# Altium PCB 800U R3N3_LED_V1.2.PcbDoc (part 1 of 2)
Units mm, origin at the board's own origin, x right, y up, seen from the top; angles counter-clockwise.
Board outline 308.48 x 220.22 mm, 4 copper layers (Top Layer, Mid-Layer 2, GND, Bottom Layer); 102 components, 70 nets, 266 pads, 117 vias.
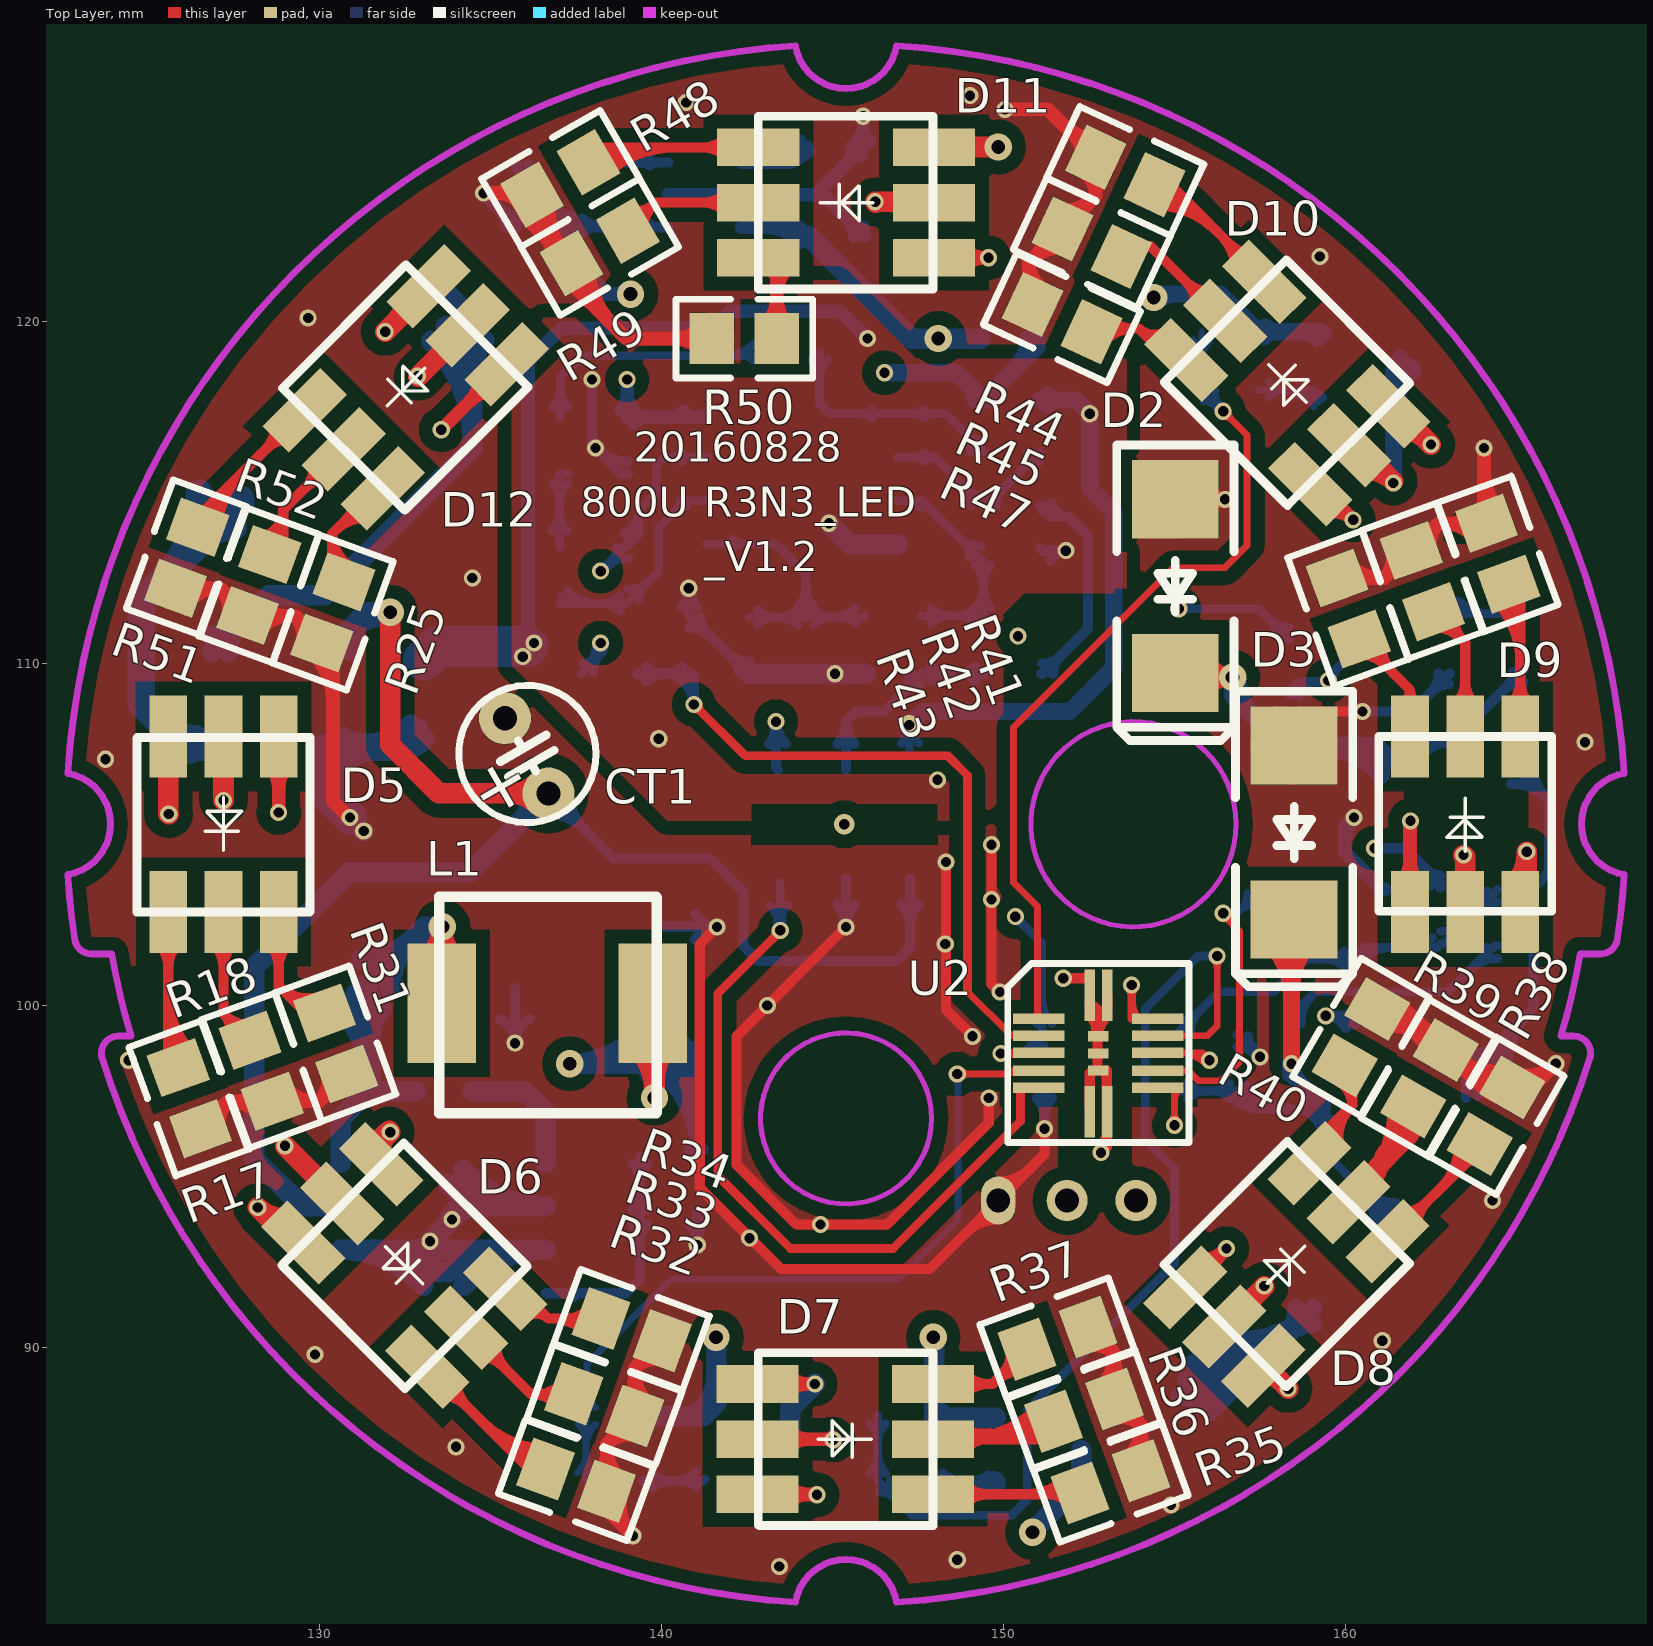
[diagram p0: Top Layer view]
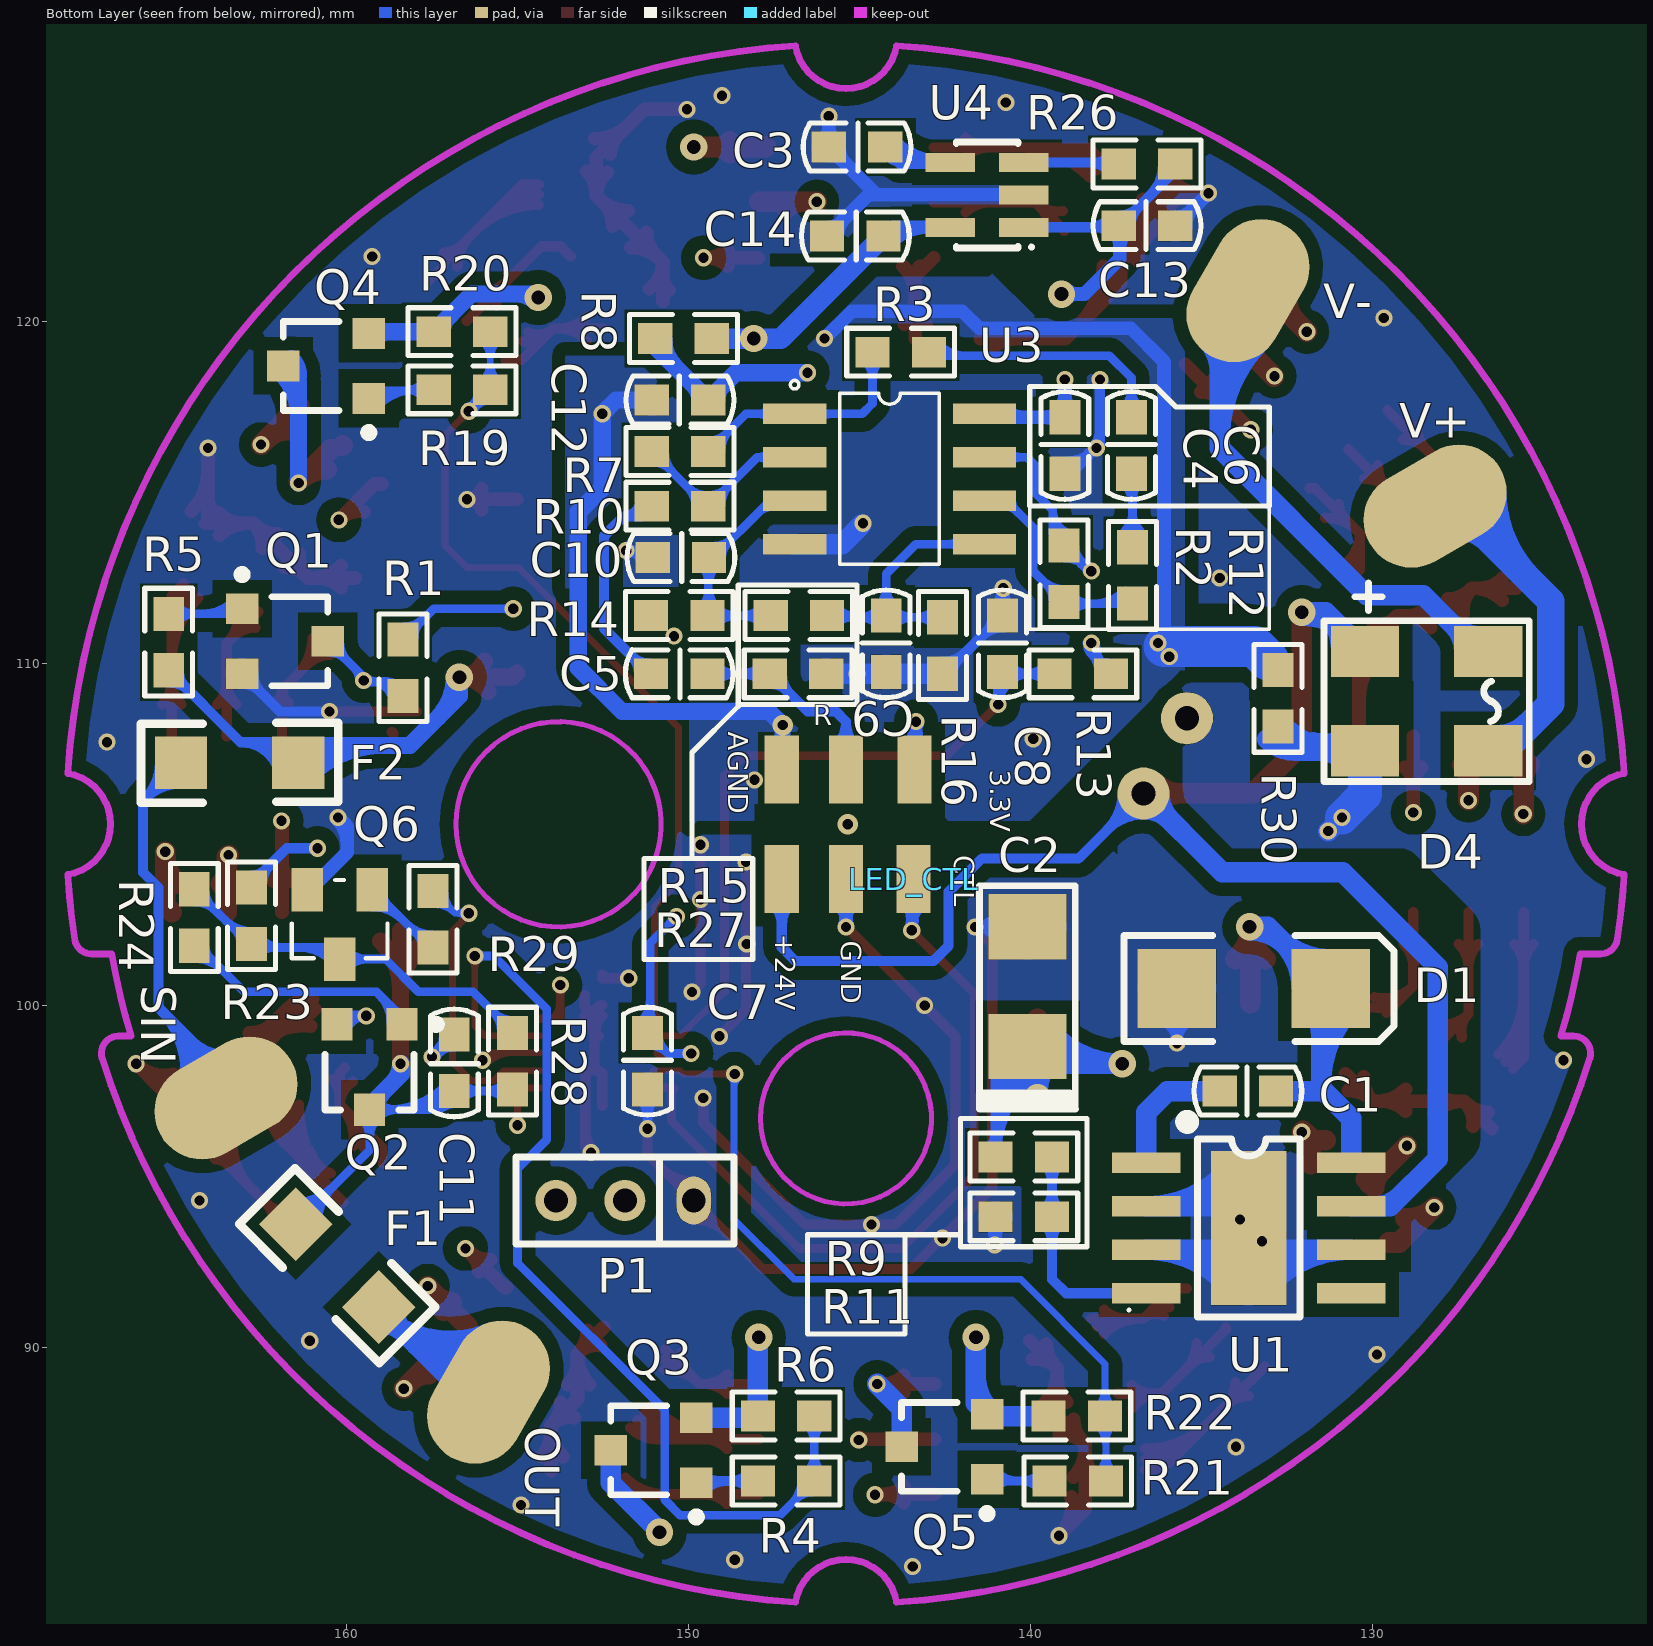
[diagram p1: Bottom Layer view, seen from below]
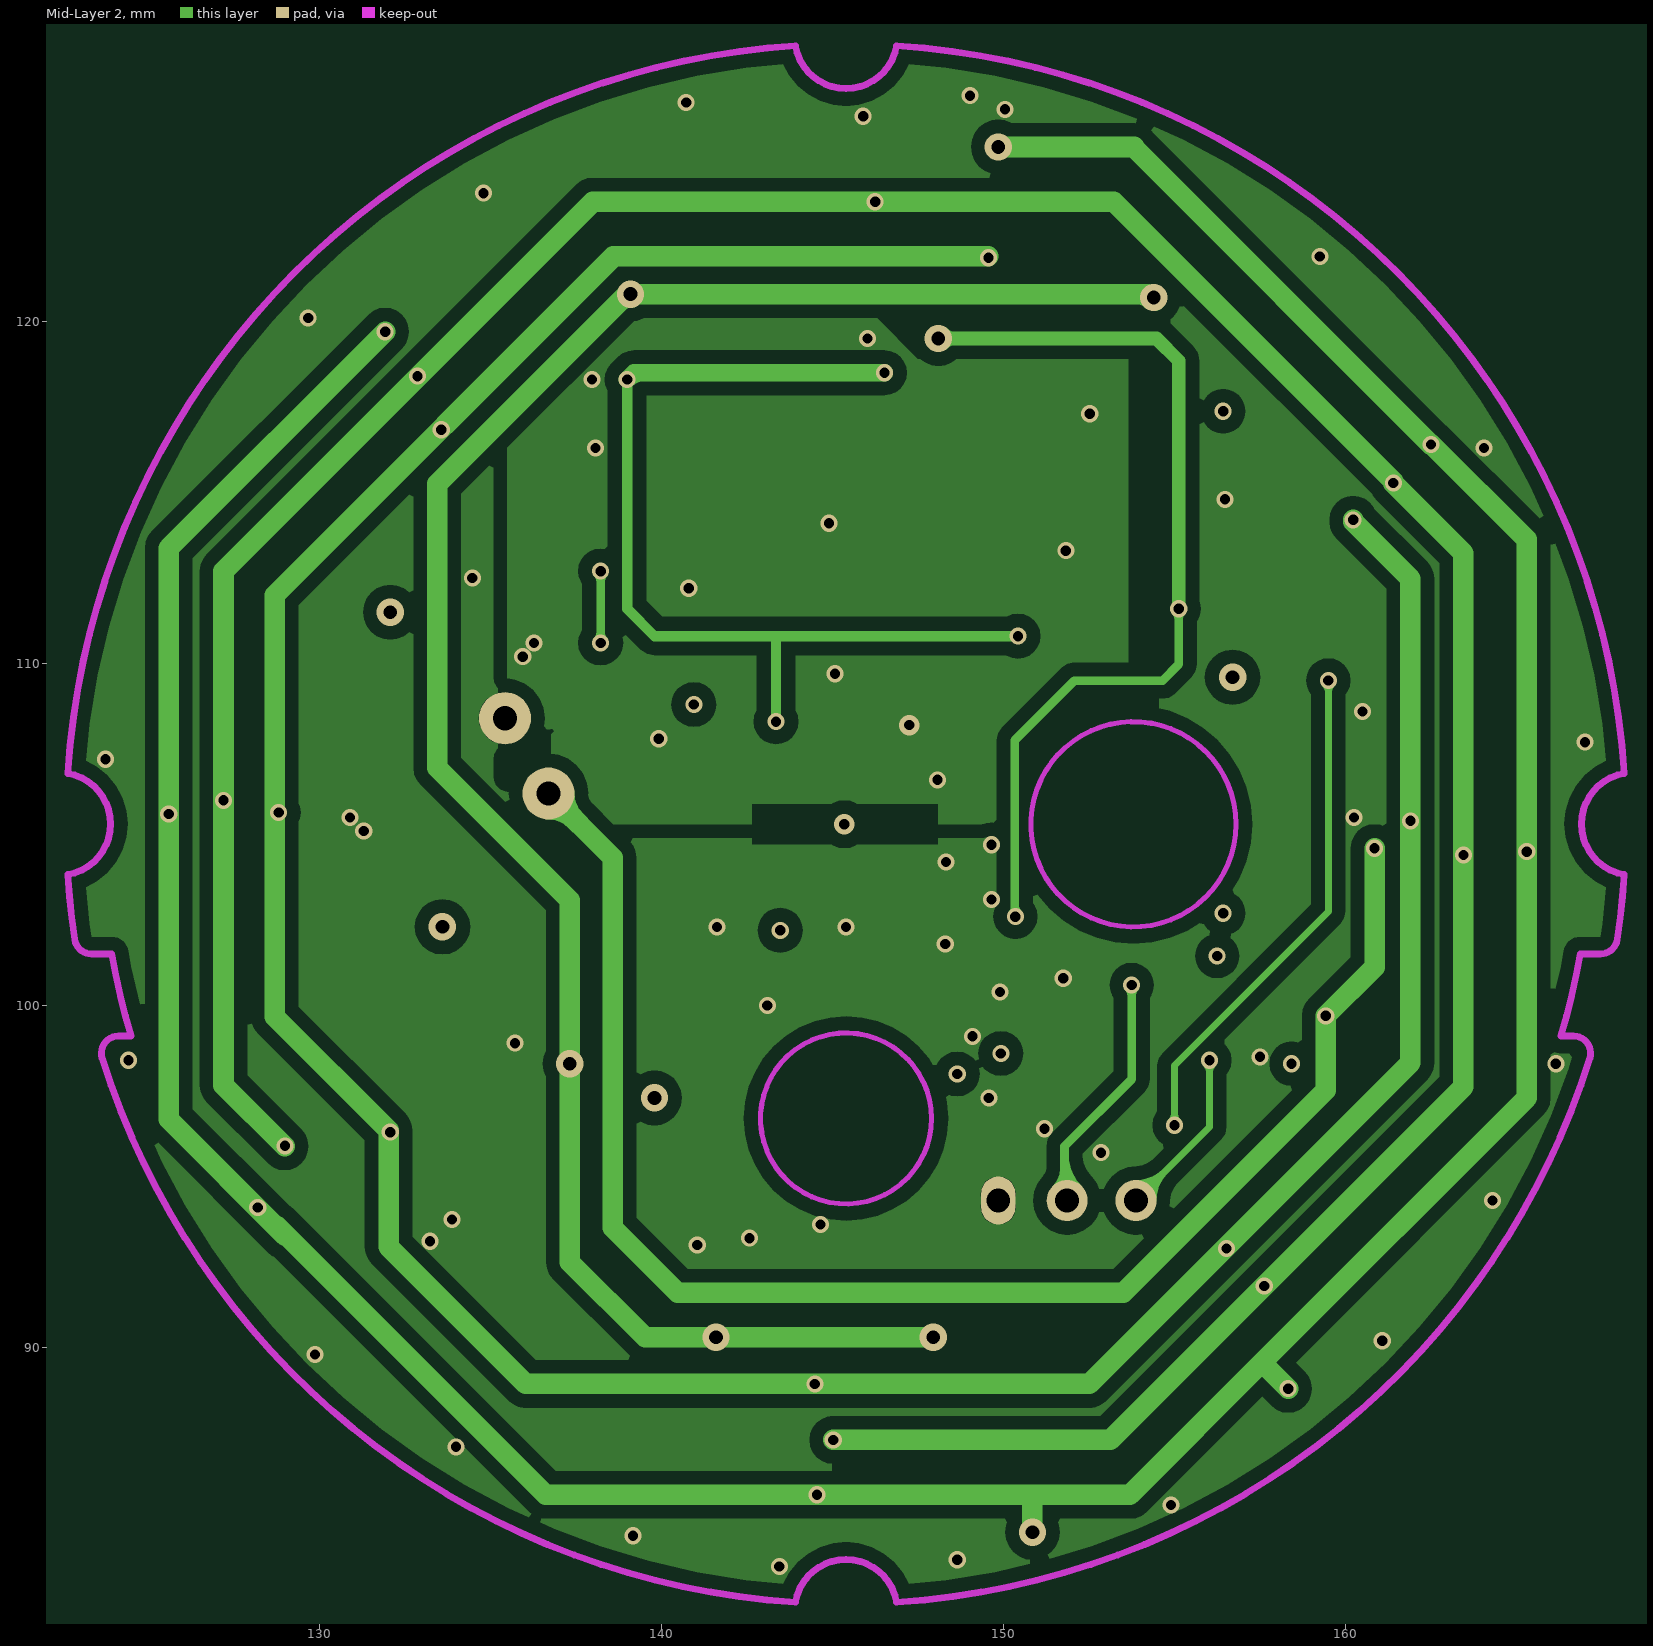
[diagram p2: Mid-Layer 2]
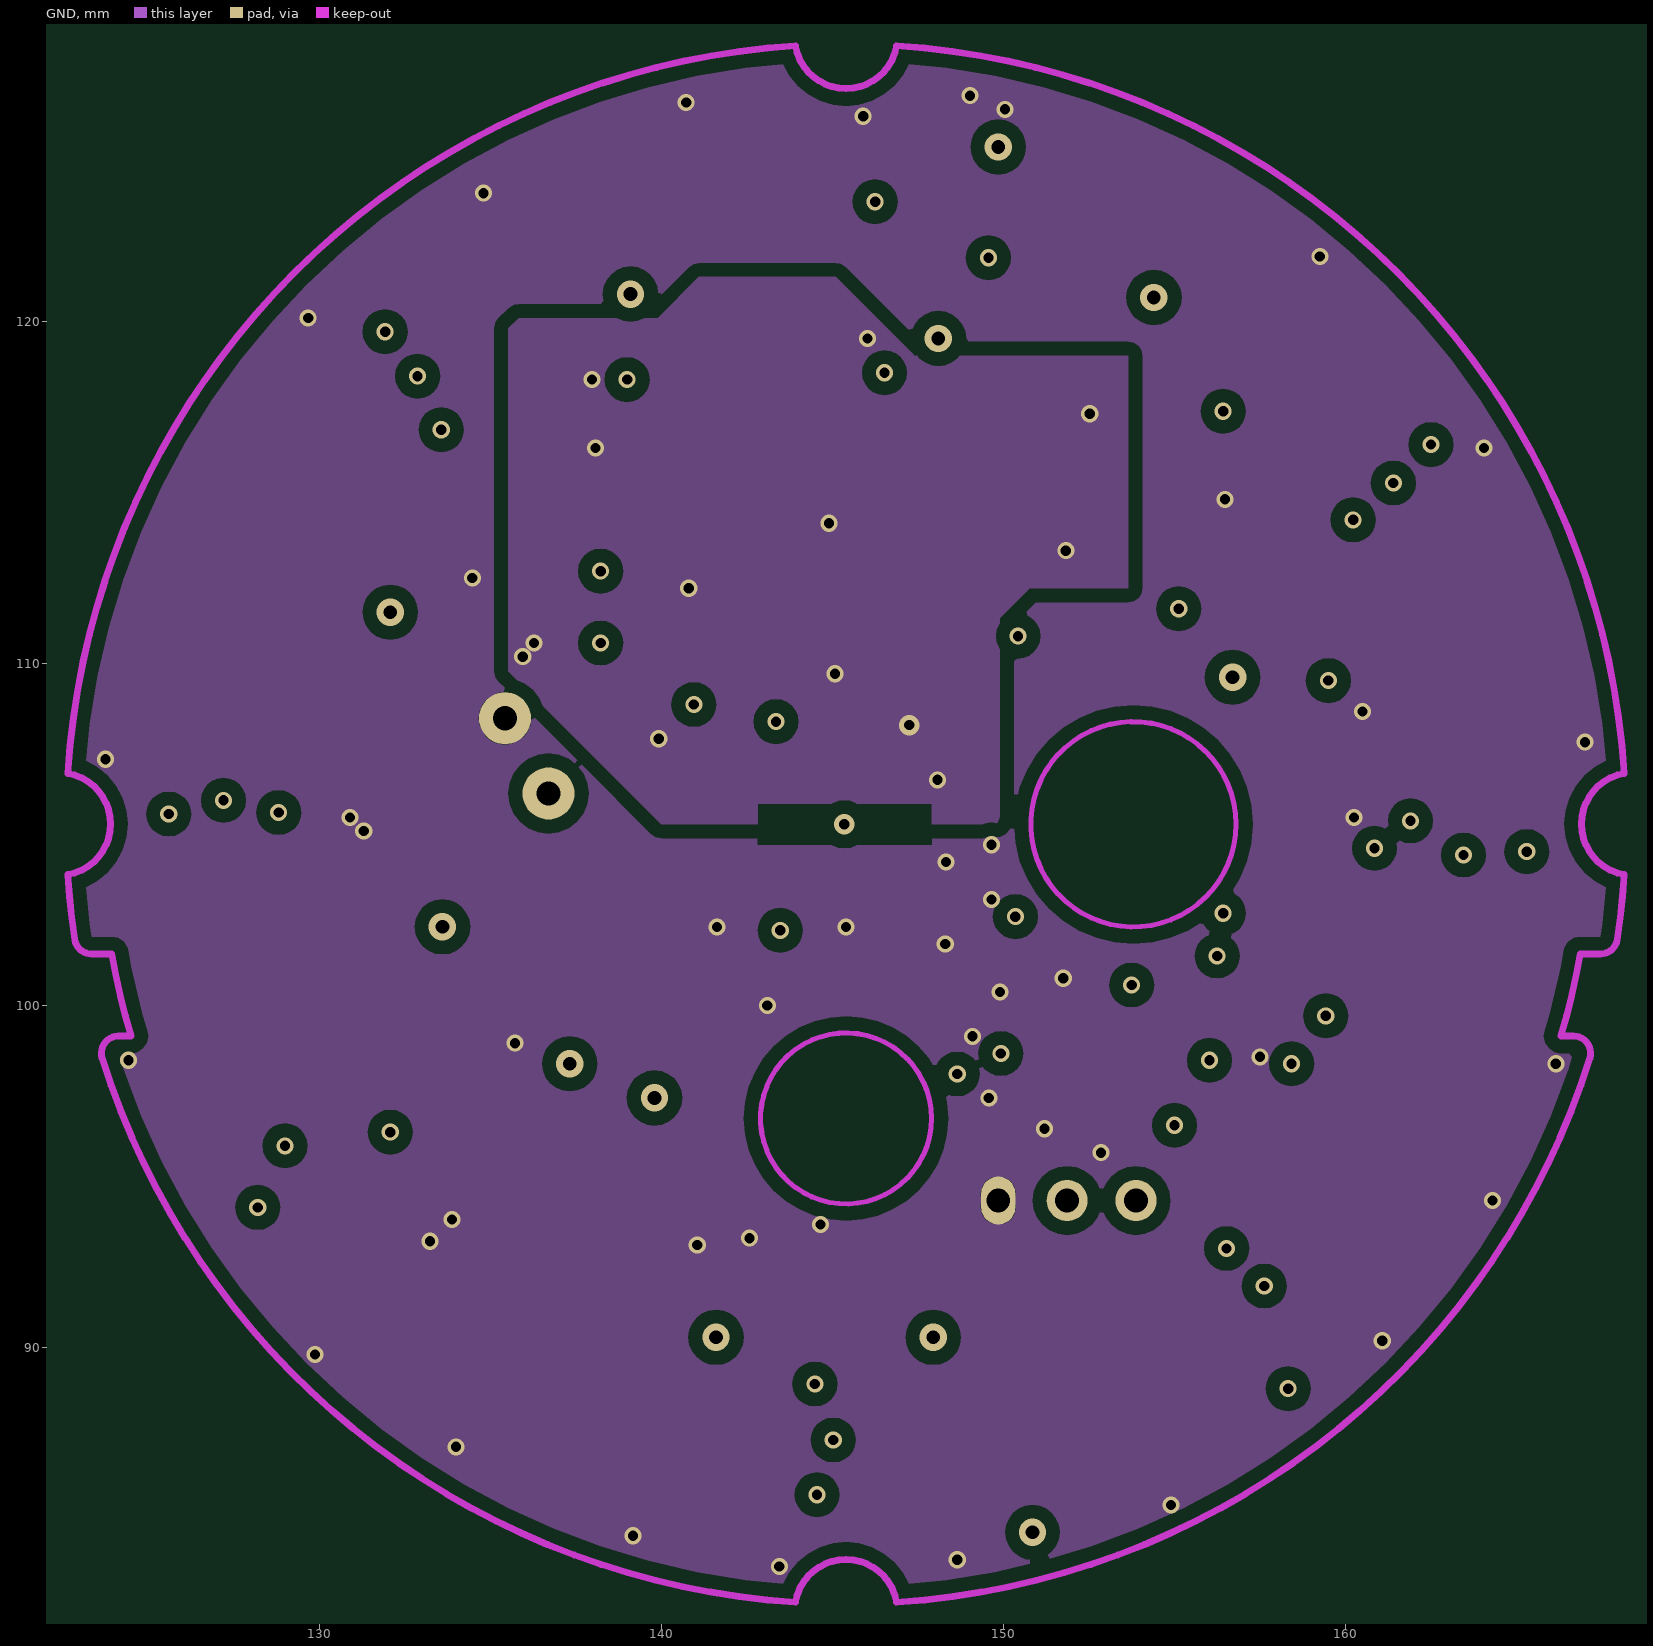
[diagram p3: GND]

## Layer stack, top to bottom
Top Layer: signal copper 0.0356
Dielectric: core 0.32, FR-4, Dk 4.8
Mid-Layer 2: signal copper 0.0356
Dielectric: prepreg 0.32, FR-4, Dk 4.8
GND: signal copper 0.0356
Dielectric: core 0.32, FR-4, Dk 4.8
Bottom Layer: signal copper 0.0356

## Board outline
-7.366,215.265 301.117,215.265 301.117,-4.191 300.736,-4.572 -6.985,-4.572 -7.366,-4.953

## Design rules (kind name [scope] priority, off if disabled: settings)
Clearance GND [InPolygon] p1: gap=0.4
Clearance Clearance_PAD [ISpad] p2: gap=0.17
Clearance [All] p3: gap=0.25
PolygonConnect [isvia] p1: connectstyle=Direct reliefconductorwidth=0.254 reliefentries=4 polygonreliefangle="90 Angle" airgapwidth=0.254
RoutingVias [All] p1: holewidth=0.3 width=0.5 viastyle="Through Hole" minholewidth=0.3 minwidth=0.5 maxholewidth=0.4 maxwidth=0.8
SilkToSolderMaskClearance SilkscreenOverComponentPads [IsPad] p1: minsilkscreentomaskgap=0.1 clearancetoexposedcopper=TRUE
SolderMaskExpansion [All] p1: expansion=0.102
UnConnectedPin [All] p1:
Width [All] p1: maxlimit=1.5 minlimit=0.2 preferedwidth=0.254 toplayer_maxwidth=0.6 midlayer1_minwidth=0.254 midlayer1_maxwidth=0.254 midlayer2_maxwidth=0.6 midlayer2_prefwidth=0.2 minimp=50.000000 maximp=50.000000 favimp=50.000000
27 further rules are at their usual default settings.

## Components (designator, comment, footprint, x,y, rotation, side; value= is the part's Value field where it differs from the comment)
3.3V "" HOLE_SMD#1 143.4,106.9 r0 bottom locked
+24V "" HOLE_SMD#1 147.275,103.7 r180 bottom locked
AGND "" HOLE_SMD#1 147.275,106.9 r180 bottom locked
C1 "10nF" C0603 134.475,97.5 r180 bottom
C2 "33uF/16V" CT3528 140.075,100.5 r90 bottom
C3 "10nF" C0603 144.25,125.1 r0 bottom
C4 "100nF" C0603 139,117.2 r270 bottom
C5 "1nF" C0603 149.45,109.7 r0 bottom
C6 "1nF" C0603 137.05,117.2 r270 bottom
C7 "1uF" C0603 151.2,99.2 r270 bottom
C8 "1nF" C0603 140.825,111.4 r270 bottom
C9 "100nF" C0603 144.225,111.4 r270 bottom
C10 "100nF" C0603 149.4,113.1 r0 bottom
C11 "100nF" C0603 156.85,97.5 r90 bottom
C12 "100nF" C0603 151.075,117.7 r180 bottom
C13 "4.7uF" C0603 137.425,122.8 r180 bottom
C14 "4.7uF" C0603 144.3,122.5 r0 bottom
CT1 "22uF/50V" RB0.1 136.7,106.2 r120 top
D1 "SS14" SMB 133.475,100.5 r180 bottom (schematic designator D4)
D2 "TVS36V" HSMA 155.025,114.8 r270 top
D3 "TVS36V" HSMA 158.5,107.6 r270 top
D4 "LX10M" "桥堆 3.8*3.5" 128.425,108.9 r90 bottom
D5 "5050RGB" 5050RGB 127.2,105.3 r90 top locked
D6 "5050RGB" 5050RGB 132.481,92.4 r135 top locked
D7 "5050RGB" 5050RGB 145.375,87.325 r180 top locked
D8 "5050RGB" 5050RGB 158.275,92.431 r225 top locked
D9 "5050RGB" 5050RGB 163.5,105.3 r270 top locked
D10 "5050RGB" 5050RGB 158.3,118.2 r315 top locked
D11 "5050RGB" 5050RGB 145.4,123.475 r0 top locked
D12 "5050RGB" 5050RGB 132.525,118.075 r45 top locked
F1 "FSMD012-1206-R" 1206 160.275,92.4 r45 bottom
F2 "FSMD012-1206-R" 1206 163.125,107.1 r0 bottom
GND "" HOLE_SMD#2 145.4,103.7 r180 top locked (schematic designator GND1)
L1 "68uH" L-6X6 133.175,100.1 r0 top
LED_CTL "CTL" HOLE_SMD#1 143.425,103.7 r180 bottom locked
OUT "" HOLE_SMD#3 155.85,88.7 r300 bottom
P1 "3P 2.0mm" SIP3 149.325,94.3 r90 bottom
Q1 "MMBT5551" SOT-23#1 161.8,110.65 r270 bottom
Q2 "S8550" SOT-23#1 159.325,98.2 r0 bottom
Q3 "Si2301CDS" SOT-23#1 151.025,87 r90 bottom (schematic designator Q6)
Q4 "Si2301CDS" SOT-23#1 160.6,118.7 r90 bottom
Q5 "Si2301CDS" SOT-23#1 142.525,87.1 r90 bottom
Q6 "MMBT5551" SOT-23#2 160.2,102.4 r0 bottom
R "" HOLE_SMD#1 145.4,106.9 r180 bottom locked (schematic designator LED_R)
R1 "10K" R0603 158.35,109.05 r90 bottom
R2 "100K" R0603 139.025,111.8 r90 bottom
R3 "0R" R0603 144.625,119.1 r180 bottom
R4 "1K" R0603 147.975,86.1 r180 bottom
R5 "10K" R0603 165.2,109.8 r90 bottom
R6 "10K" R0603 147.975,88 r180 bottom
R7 "200K" R0603 151.075,116.2 r180 bottom
R8 "0R" R0603 149.325,119.5 r0 bottom
R9 "4.75K/1%" R0603 139.375,95.575 r0 bottom
R10 "12K" R0603 151.075,114.6 r180 bottom
R11 "1.62K/1%" R0603 141.025,93.825 r180 bottom
R12 "10K" R0603 137.025,113.4 r270 bottom
R13 "0R" R0603 137.65,109.7 r0 bottom
R14 "5.1K" R0603 151.1,111.4 r180 bottom
R15 "2K" R0603 147.6,111.4 r180 bottom
R16 "5.1K" R0603 142.575,109.7 r90 bottom
R17 "200R" 0805 126.525,96.4 r110 top
R18 "150R" 0805 128.625,97.2 r110 top
R19 "1K" R0603 157.45,118 r180 bottom
R20 "10K" R0603 157.45,119.7 r180 bottom
R21 "1K" R0603 139.45,86.1 r180 bottom
R22 "10K" R0603 139.475,88 r180 bottom
R23 "10K" R0603 162.775,101.8 r90 bottom
R24 "10K" R0603 164.45,103.4 r270 bottom
R25 "150R" 0805 130.075,110.6 r70 top
R26 "10K" R0603 135.775,124.6 r0 bottom
R27 "10K" R0603 147.625,109.7 r180 bottom
R28 "0R" R0603 155.15,99.2 r270 bottom
R29 "2K" R0603 157.475,101.7 r90 bottom
R30 "0R" R0603 132.769,108.156 r90 bottom
R31 "150R" 0805 130.8,98 r110 top
R32 "200R" 0805 138.4,85.8 r160 top
R33 "150R" 0805 139.225,88 r160 top
R34 "150R" 0805 140.025,90.2 r160 top
R35 "200R" 0805 154.025,86.4 r200 top
R36 "150R" 0805 153.25,88.5 r200 top
R37 "150R" 0805 152.475,90.6 r200 top
R38 "200R" 0805 164.875,97.6 r240 top
R39 "150R" 0805 162.925,98.7 r240 top
R40 "150R" 0805 160.925,99.9 r240 top
R41 "200R" 0805 164.125,114.1 r290 top
R42 "150R" 0805 161.925,113.3 r290 top
R43 "150R" 0805 159.75,112.5 r290 top
R44 "200R" 0805 152.7,124.8 r335 top
R45 "150R" 0805 151.725,122.7 r335 top
R47 "150R" 0805 150.85,120.5 r335 top
R48 "200R" 0805 136.225,123.7 r30 top
R49 "150R" 0805 137.375,121.7 r30 top
R50 "150R" 0805 141.475,119.5 r0 top
R51 "200R" 0805 125.8,112.2 r70 top
R52 "150R" 0805 127.9,111.4 r70 top
SIN "" HOLE_SMD#3 163.525,97.3 r150 bottom
U1 "L22674" SO-1.27-9/4.0 136.625,95.4 r270 bottom locked
U2 "C8051F300" QFN-11 152.775,98.6 r0 top locked
U3 "TP2312-SR" SO-8 146.9,117.3 r90 bottom locked (schematic designator U5)
U4 "SP6205" SOT-23-5 141.275,123.7 r180 bottom
V+ "" HOLE_SMD#4 128.175,114.6 r195 bottom
V- "" HOLE_SMD#3 133.65,120.9 r300 bottom

## Footprints (in the part's own frame and the unit in brackets; to place one, negate y for a bottom-side part, rotate by r counter-clockwise, add the part's x,y. Pads: shape width x height; smd on the part's side, far side on the other; paste and mask are expansions set on the pad)
0805 [mm] "Thermistor; 2 Leads"
  rect 1.3x1.5 smd: 1(0,0) 2(1.9,0)
  silkscreen extent -1.05,-1.15 2.95,1.15
1206 [mil]
  rect 60x60 smd: 1(-67.5,0) 2(67.5,0)
  silkscreen extent -114,-46 114,46
5050RGB [mm]
  rect 2.4x1.1 smd: 1(-2.565,1.613) 2(-2.565,0) 3(-2.565,-1.613) 4(2.565,-1.613) 5(2.565,0) 6(2.565,1.613)
  silkscreen extent -2.56,-2.53 2.54,2.53
C0603 [mm]
  rect 1x0.9 smd: 1(0,0) 2(1.65,0)
  silkscreen extent -0.75,-0.7 2.4,0.7
CT3528 [mil]
  rect 75x90 smd: 1(-66.85,0.75) 2(70.94,0.75)
  silkscreen extent -139,-54 118,56
HOLE_SMD#1 [mm]
  rect 1x2 smd: 1(0,0)
HOLE_SMD#2 [mm]
  rect 1x2 smd far side: 1(0,0)
HOLE_SMD#3 [mm]
  oval 4.4x2.8 smd: 1(0,0)
HOLE_SMD#4 [mm]
  oval 4.4x2.8 smd rot 45: 1(0,0)
HSMA [mil]
  rect 90x100 smd: 1(0,0) 2(200,0)
  silkscreen extent -63,-68 278,68
L-6X6 [mm]
  rect 2x3.5 smd: 1(0.403,-0.033) 2(6.571,-0.033)
  silkscreen extent 0.33,-3.25 6.69,3.08
QFN-11 [mm]
  rect 1.5x0.305 smd: 1(-1.737,1.018) 2(-1.737,0.518) 3(-1.737,0.018) 4(-1.737,-0.507) 5(-1.737,-1.007) 6(1.737,-1.007) 7(1.737,-0.507) 8(1.737,0.018) 9(1.737,0.518) 10(1.737,1.018)
  rect 0.305x1.5 smd: 11(-0.248,-1.705) 11(-0.248,1.705) 11(0.26,-1.705) 11(0.26,1.705)
  rect 0.6x0.3 smd: 11(0,-0.5) 11(0,0) 11(0,0.5)
  silkscreen extent -2.65,-2.6 2.65,2.63
R0603 [mm]
  rect 1x0.9 smd: 1(0,0) 2(1.65,0)
  silkscreen extent -0.75,-0.7 2.4,0.7
RB0.1 [mil]
  round 60 hole 28: 1(0,0) 2(100,0)
  silkscreen extent -27,-81 131,77
SIP3 [mm]
  oval 1.4x1 hole 0.7: 1(0,0.525)
  round 1.2 hole 0.7: 2(0,2.54) 3(0,4.55)
  silkscreen extent -1.28,-0.65 1.27,5.72
SMB [mm] "DO-214-AA/SMB; 2 C-Bend Leads; Body 5.3 x 3.6 mm, inc. leads (LxW)"
  rect 2.3x2.3 smd: 1(-2.25,0) 2(2.25,0)
  silkscreen extent -3.8,-1.55 4.1,1.55
SO-1.27-9/4.0 [mm]
  rect 0.6x2 smd: 1(0,0) 2(1.27,0) 3(2.54,0) 4(3.81,0) 5(3.81,6) 6(2.54,6) 7(1.27,6) 8(0,6)
  rect 4.5x2.2 smd: 9(1.905,3)
  silkscreen extent -1.35,1.05 4.5,4.5
SO-8 [mm]
  rect 0.6x1.85 smd: 1(0,0) 2(-1.27,0) 3(-2.54,0) 4(-3.81,0) 5(-3.81,-5.55) 6(-2.54,-5.55) 7(-1.27,-5.55) 8(0,-5.55)
  silkscreen extent -4.41,-4.23 0.97,0.13
SOT-23#1 [mm] "SOT-23; 3 Leads; Body 3.0 x 2."
  rect 0.9x0.95 smd: 1(-0.95,-1.25) 2(0.95,-1.25) 3(0,1.25)
  silkscreen extent -2.07,-1.38 1.3,1.25
SOT-23#2 [mm]
  rect 0.914x1.27 smd: 1(-0.953,-0.991) 2(0.953,-0.991) 3(0,1.041)
  silkscreen extent -1.4,-1.27 1.4,1.02
SOT-23-5 [mm]
  rect 1.45x0.55 smd: 1(1.075,-0.95) 2(1.075,0) 3(1.075,0.95) 4(-1.075,0.95) 5(-1.075,-0.95)
  silkscreen extent -0.9,-1.57 1.35,1.55
"桥堆 3.8*3.5" [mm]
  rect 1.5x2 smd: 1(1.45,1.8) 2(1.45,-1.8) 3(-1.45,-1.8) 4(-1.45,1.8)
  silkscreen extent -2.35,-3 3.45,3

## Part data
3.3V +24V AGND GND LED_CTL OUT R SIN V+ V-: library part 焊盘
C1 C4 C5 C6 C8 C9 C10: library part Cap, "Capacitor"
C2 CT1: library part "Cap Pol1", "Polarized Capacitor (Radial)"
C3 C12 C13 C14: library part CAP, "Capacitor"
C7 C11: library part Cap, "贴片电容"
D1: library part SMBJ6.0CA
D2 D3: library part "D Schottky", "贴片TVS"
D4: library part Bridge2, "贴片桥堆"
D5 D6 D7 D8 D9 D10 D11 D12: "RBG发光管"
F1 F2: library part "Fuse 2", "Fuse"
L1: library part 电感
P1: library part MHDR1X3, "插座"
Q1: library part NPN, "贴片NPN三极管"
Q2: "贴片PNP三极管"
Q3 Q4 Q5: library part P-MOSFET, "贴片MOS管"
Q6: library part NPN, "NPN三极管"
R1 R4 R5 R6 R17 R18 R19 R20 R21 R22 R23 R24 R25 R28 R29 R31 R32 R33 R34 R35 R36 R37 R38 R39 R40 R41 R42 R43 R44 R45 R47 R48 R49 R50 R51 R52: library part "Res Semi", "贴片电阻"
R2 R3 R7 R9 R10 R11 R12 R13 R14 R15 R16 R27 R30: library part "Res Semi", "Semiconductor Resistor"
R8 R26: library part Res1, "Resistor"
U1: library part 2674
U2: library part PIC16C505, "贴片芯片"
U3: library part LM833D, "Dual Low Noise, Audio Amplifier"
U4: library part SP6203/SP6205

## Via types
v1: diameter 0.5, hole 0.3, Top Layer to Bottom Layer, 103 vias
v2: diameter 0.8, hole 0.4, Top Layer to Bottom Layer, 12 vias
v3: diameter 0.6, hole 0.3, Top Layer to Bottom Layer, 2 vias

## Nets (pads, with @x,y where several pads share a name; then routed paths per layer and width w, separated by ;. In a path a pad name is that pad's centre, name@x,y a point inside that pad or via, vN(x,y) a via of type N, cw(c..) or ccw(c..) an arc to the next point about the centre after c; other vN are vias at no path point)
3.3V: C7.1 C14.1 R1.2 R8.1 U2.3 U4.5 | length 53.5
  Top Layer w0.254: v1(149.925,98.6) U2.3@150.894,98.6 ; v1@150.012,98.513 cw(c150.222,98.303) 150.222,98.6 cw(c150.222,98.897) v1@150.012,98.687
  Mid-Layer 2 w0.254: v1@150.263,102.687 ccw(c150.098,102.852) 150.331,102.852 ; 150.331,102.942 ccw(c150.692,102.942) v1@150.437,102.687 ; v1(150.35,102.6) 150.331,102.619 150.331,107.756 152.075,109.5 154.65,109.5 155.125,109.975 v1(155.125,111.6) ; v1@155.038,111.513 cw(c154.828,111.303) 155.125,111.303 cw(c155.422,111.303) v1@155.212,111.513
  Mid-Layer 2 w0.4: v2(148.1,119.5) 154.475,119.5 155.125,118.85 155.125,115.448 v1(155.125,111.6) ; v2@148.241,119.359 cw(c148.583,119.017) 148.583,119.5 cw(c148.583,119.983) v2@148.241,119.641
  Bottom Layer w0.254: C14.1@144.05,122.75 C14.1@144.3,122.5 ; v1(149.925,98.6) 150.6,98.6 ; v1@150.012,98.513 cw(c150.222,98.303) 150.222,98.6 cw(c150.222,98.897) v1@150.012,98.687 ; v1@150.35,102.477 cw(c150.35,102.18) 150.56,102.39 cw(c150.77,102.6) v1@150.473,102.6 ; v1(150.35,102.6) 151.123,101.827 151.123,99.277 C7.1@151.2,99.2 150.6,98.6 ; 150.684,98.684 ccw(c150.218,99.15) C7.1@150.877,99.15 ; C7.1@150.972,99.478 ccw(c150.606,99.844) 151.123,99.844 ; 151.123,100.216 ccw(c152.166,100.216) C7.1@151.428,99.478 ; C7.1@151.186,98.827 ccw(c151.151,98.049) 150.6,98.6 ; v1(155.125,111.6) 157.45,111.6 R1.2@158.35,110.7 ; v1@155.212,111.513 cw(c155.422,111.303) 155.422,111.6 cw(c155.422,111.897) v1@155.212,111.687 ; 157.713,111.337 ccw(c158.35,111.973) R1.2@158.35,111.073 ; 157.834,111.216 cw(c157.368,110.75) R1.2@158.027,110.75
  Bottom Layer w0.4: U4.5@142.35,122.75 C14.1@144.05,122.75 ; U4.5@143.043,122.75 cw(c143.043,121.293) C14.1@144.073,122.323
  Bottom Layer w0.6: C14.1@144.3,122.5 147.3,119.5 R8.1@149.325,119.5
+24V: +24V.1 CT1.1 D4.1 Q2.2 R23.2 U1.7 | length 109.6
  Top Layer w0.6: v2(132.075,111.5) 132.075,107.625 133.5,106.2 CT1.1@136.7,106.2 ; CT1.1@136.373,105.873 ccw(c135.585,105.085) 135.585,106.2 ccw(c135.585,107.315) CT1.1@136.373,106.527
  Mid-Layer 2 w0.6: CT1.1@136.7,105.738 cw(c136.7,104.623) 137.489,105.411 cw(c138.277,106.2) CT1.1@137.162,106.2 ; CT1.1@136.7,106.2 138.575,104.325 138.575,93.5 140.475,91.6 153.5,91.6 159.425,97.525 v1(159.425,99.7) 160.85,101.125 v1(160.85,104.6)
  Bottom Layer w0.3: CT1.1@136.7,105.588 cw(c136.7,104.111) 137.745,105.155 cw(c138.79,106.2) CT1.1@137.312,106.2 ; CT1.1@136.7,106.2 138.6,104.3 141.425,104.3 142.4,103.325 142.4,101.75 142.85,101.3 146.875,101.3 147.275,101.7 +24V.1@147.275,103.7 ; +24V.1@147.028,102.953 cw(c146.43,102.355) 147.275,102.355 cw(c148.12,102.355) +24V.1@147.522,102.953 ; v1(159.425,99.7) 160.025,99.7 Q2.2@160.275,99.45 ; v1(159.425,99.7) cw(c159.425,99.049) Q2.2@160.007,99.341 ; Q2.2@160.275,99.7 Q2.2@160.35,99.7 ; v1(160.85,104.6) 161.75,104.6 162.775,103.575 R23.2@162.775,103.45 ; 162.21,104.14 cw(c161.57,103.5) R23.2@162.475,103.5 ; 162.391,103.959 ccw(c162.775,104.343) R23.2@162.775,103.8
  Bottom Layer w0.6: 129.191,94.434 ccw(c129.925,95.168) U1.7@129.925,94.13 ; D4.1@130.225,110.35 131.375,111.5 ; U1.7@130.625,94.13 129.495,94.13 128.1,95.525 128.1,101.125 130.875,103.9 134.4,103.9 CT1.1@136.7,106.2 ; D4.1@130.709,110.834 cw(c132.075,109.469) v2@132.075,111.4 ; D4.1@130.925,110.364 cw(c132.463,110.411) 131.375,111.5 ; v2(132.075,111.5) 131.375,111.5 ; CT1.1@136.238,106.2 cw(c135.123,106.2) 135.911,105.411 cw(c136.7,104.623) CT1.1@136.7,105.738
A3.3V: 3.3V.1 C4.1 C12.2 R8.2 R14.1 U3.8 | length 45.5
  Mid-Layer 2 w0.3: v1(139,118.3) 139,111.6 139.8,110.8 143.35,110.8 ; v1(143.35,108.3) 143.35,110.8 ; v1(150.425,110.8) 143.35,110.8
  Mid-Layer 2 w0.5: 139.483,118.5 ccw(c139.483,117.817) v1(139,118.3) 139.2,118.5 v1(146.525,118.5)
  Bottom Layer w0.3: 3.3V.1@143.153,107.647 ccw(c142.676,108.124) v1@143.35,108.124 ; v1@143.263,108.25 cw(c142.92,108.052) 143.303,107.949 ; 3.3V.1@143.4,106.9 143.35,106.95 v1(143.35,108.3) ccw(c144.212,108.3) 3.3V.1@143.635,107.66
  Bottom Layer w0.4: C4.1@138.823,117.427 ccw(c138.396,117.854) 139,117.854 ccw(c139.604,117.854) C4.1@139.177,117.427 ; v1(139,118.3) C4.1@139,117.2 141.25,117.2 U3.8@141.35,117.3 ; C4.1@139.177,117.023 cw(c139.604,116.596) 139.604,117.2 cw(c139.604,117.804) C4.1@139.177,117.377 ; 140.242,117.2 ccw(c140.242,117.783) U3.8@140.654,117.371
  Bottom Layer w0.5: v1(146.525,118.5) 148.625,118.5 C12.2@149.425,117.7 150.975,119.25 R8.2@150.975,119.5 ; C12.2@148.998,118.127 cw(c148.571,117.7) C12.2@149.175,117.7 ; C12.2@149.675,117.7 cw(c150.279,117.7) C12.2@149.852,118.127 ; 150.371,118.646 ccw(c149.518,119.5) R8.2@150.725,119.5
ADCIN1: C8.2 R13.2 U2.2 | length 23.5
  Top Layer w0.2: 148.95,100.4 150.232,99.118 U2.2@150.863,99.118
  Top Layer w0.254: v1@140.95,108.677 cw(c140.95,108.38) 141.16,108.59 cw(c141.37,108.8) v1@141.073,108.8 ; v1(140.95,108.8) 142.45,107.3 148.375,107.3 148.95,106.725 148.95,100.4
  Bottom Layer w0.3: R13.2@139.3,109.7 140.775,109.7 C8.2@140.825,109.75 ; R13.2@139.562,109.488 cw(c140.074,108.976) 140.074,109.7 cw(c140.074,110.424) R13.2@139.562,109.912 ; C8.2@140.613,109.488 ccw(c140.101,108.976) 140.101,109.7 ccw(c140.101,110.424) C8.2@140.613,109.912 ; C8.2@140.633,109.47 cw(c140.066,108.791) v1@140.95,108.791 ; v1(140.95,108.8) C8.2@140.95,109.625
AGND: AGND.1 C4.2 C8.1 C9.2 C10.2 C12.1 R16.1 R27.2 R30.2 U3.4 | length 63.1
  Bottom Layer w0.254: AGND.1@147.011,107.664 ccw(c146.435,108.24) v3@147.25,108.24 ; v3@147.1,108.113 cw(c146.769,107.922) AGND.1@147.138,107.823 ; v3@147.128,108.078 cw(c146.832,107.782) 147.25,107.782 cw(c147.668,107.782) v3@147.372,108.078 ; AGND.1@147.136,107.815 cw(c147.481,107.723) v3@147.325,108.044 ; v3@147.19,108.038 cw(c147.086,107.758) AGND.1@147.375,107.835 ; AGND.1@147.25,107.4 147.25,108.3 ccw(c148.093,108.3) AGND.1@147.526,107.676 ; AGND.1@147.367,107.864 cw(c147.685,107.949) v3@147.4,108.114
  Bottom Layer w0.3: 137.975,116.783 ccw(c138.558,116.783) v1@138.146,116.371 ; v1(137.975,118.3) 137.975,116.4 v1(138.075,116.3) 138.825,115.55 C4.2@139,115.55 ; v1@138.104,116.271 ccw(c139,117.167) C4.2@139,115.9 ; v1@138.172,116.326 ccw(c138.44,116.398) 138.301,116.157 ; C8.1@140.613,111.662 ccw(c140.101,112.174) 140.825,112.174 ccw(c141.549,112.174) C8.1@141.037,111.662 ; v1@140.713,112.15 cw(c140.413,111.977) C8.1@140.748,111.887 ; v1@140.729,112.129 cw(c140.498,111.898) C8.1@140.825,111.898 ; v1@140.75,112.113 cw(c140.599,111.853) 140.89,111.931 ; v1(140.8,112.2) 140.825,112.175 C8.1@140.825,111.4 142.525,109.7 R16.1@142.575,109.7 ; C8.1@140.825,111.05 cw(c140.825,110.205) 141.422,110.803 ; C8.1@141.125,111.35 ccw(c141.729,111.35) 141.302,110.923 ; 141.892,110.333 ccw(c142.575,111.016) R16.1@142.575,110.05 ; R16.1@142.134,110.091 cw(c141.792,109.75) R16.1@142.275,109.75 ; C10.2@151.075,113.375 151.15,113.3 v1(151.825,113.3) ccw(c151.825,112.824) C10.2@151.38,112.993
  Bottom Layer w0.4: v1@136.1,110.5 136.1,118.825 137.075,119.8 141.5,119.8 142,120.3 145.225,120.3 v1(146.025,119.5) ; 136.1,111.143 ccw(c136.818,111.143) v1@136.31,110.635
  Bottom Layer w0.5: v3(147.25,108.2) 147.65,108.6 151.95,108.6 153.225,109.875 153.225,114.425 152.525,115.125 v1(152.525,117.3) 152.125,117.7 C12.1@151.075,117.7 ; C12.1@151.266,117.559 cw(c151.608,117.217) 151.608,117.7 cw(c151.608,118.183) C12.1@151.266,117.841
  Bottom Layer w0.6: R16.1@142.575,109.7 R27.2@145.975,109.7 ; v1@144.95,114.05 145.51,113.49 U3.4@146.9,113.49
  Bottom Layer w1.2: R30.2@133.054,110.104 133.45,110.5 v1@136.1,110.5
  other v1: 148.075,106.6 139.925,107.8 145.075,109.7 135.95,110.2 136.275,110.6 144.9,114.1
BLUE: D5.4 D6.4 D7.4 D8.4 D9.4 D10.4 D11.4 D12.4 Q5.3 | length 126.7
  Top Layer w0.4: D5.4@128.565,106.968 cw(c127.968,106.37) 128.813,106.37 cw(c129.658,106.37) D5.4@129.06,106.968 ; v1(128.813,105.643) D5.4@128.813,107.865 D5.4@128.813,107.162 ; v1(133.565,116.835) D12.4@135.48,118.749 ; D12.4@134.67,118.289 cw(c133.825,118.289) 134.422,117.691 cw(c135.02,117.094) D12.4@135.02,117.939 ; D7.4@142.81,88.938 v1(144.488,88.938) ; D7.4@143.707,88.69 cw(c144.305,88.093) 144.305,88.938 cw(c144.305,89.783) D7.4@143.707,89.185 ; D11.4@147.965,121.862 v1(149.562,121.862) ; D11.4@148.863,121.615 cw(c149.46,121.017) 149.46,121.862 cw(c149.46,122.707) D11.4@148.863,122.11 ; D8.4@155.32,91.758 155.383,91.758 v1(156.525,92.9) ; D8.4@155.78,92.567 ccw(c155.78,93.562) v1@156.484,92.859 ; D8.4@156.13,92.217 cw(c156.825,92.217) 156.334,92.709 ; D10.4@158.974,115.245 159.18,115.245 v1(160.225,114.2) ccw(c159.62,113.595) D10.4@159.487,114.44 ; D9.4@161.64,103.632 ccw(c161.042,104.23) 161.887,104.23 ccw(c162.732,104.23) D9.4@162.135,103.632 ; D9.4@161.887,102.735 v1@161.887,105.4 ; 156.32,92.684 cw(c156.631,92.504) 156.538,92.852 ccw(c156.631,92.504) 156.32,92.684
  Top Layer w0.6: D6.4@131.379,96.062 ccw(c131.485,96.89) v1(132.075,96.3) 131.808,96.033 D6.4@131.808,95.355 ; D6.4@131.808,95.775 cw(c132.6,95.775) v1@132.04,96.335 ; D6.4@131.808,95.922 cw(c132.295,95.922) v1@132.05,96.343
  Mid-Layer 2 w0.6: v1@149.562,121.9 138.6,121.9 128.7,112 128.7,99.675 132.025,96.35 132.025,92.95 136.037,88.938 v1(144.488,88.938) 152.513,88.938 161.9,98.325 161.9,112.475 160.225,114.15 v1(160.225,114.2)
  Bottom Layer w0.6: Q5.3@143.775,87.1 143.775,88.225 v1(144.488,88.938)
  other v1: 161.9,105.4
GND: C2.2 C3.2 C7.2 C11.2 C13.2 C14.2 CT1.2 D1.1 D2.1 D3.1 D4.4 GND.1 P1.1 Q1.2 Q6.2 R11.1 R17.1 R18.1 R25.1 R30.1 R31.1 R32.1 R33.1 R34.1 R35.1 R36.1 R37.1 R38.1 R39.1 R40.1 R41.1 R42.1 R43.1 R44.1 R45.1 R47.1 R48.1 R49.1 R50.1 R51.1 R52.1 U1.2 U1.3 U1.6 U1.9 U2.11 U4.2 | length 279.9
  Top Layer w0.3: v1(141.625,102.3) 141.123,101.798 141.123,94.677 143.5,92.3 147.85,92.3 P1.1@149.85,94.3 151.2,95.65 v1(151.2,96.4) ; 142.387,93.413 cw(c142.173,93.2) v1@142.475,93.2 ; v1@142.575,93.1 cw(c142.575,92.798) 142.788,93.012 ; v1(145.4,102.3) 142.2,99.1 142.2,95.35 143.95,93.6 146.6,93.6 149.575,96.575 v1(149.575,97.3) ; v1@148.229,101.729 cw(c147.998,101.498) 148.325,101.498 ; v1@148.229,101.871 ccw(c147.998,102.102) 148.325,102.102 ; v1(148.321,104.2) 148.321,102.722 148.325,102.718 148.325,99.875 v1(149.1,99.1) ; 148.911,93.361 cw(c149.85,92.422) P1.1@149.85,93.75 ; 149.394,93.844 ccw(c149.138,94.1) P1.1@149.5,94.1 ; v1(149.65,104.7) 149.65,100.65 v1(149.9,100.4) ; P1.1@149.85,94.85 ccw(c149.85,96.178) 150.789,95.239 ; P1.1@150.2,94.5 cw(c150.562,94.5) 150.306,94.756 ; v1(151.75,100.8) U2.11@152.525,100.8 ; 152.273,100.8 ccw(c152.273,101.158) U2.11@152.526,100.905 ; U2.11@152.525,97.067 U2.11@152.525,98.025 ; 152.525,97.859 cw(c152.866,97.859) U2.11@152.625,98.1 ; U2.11@152.526,99.706 cw(c151.985,99.165) U2.11@152.75,99.165 ; U2.11@152.527,99.706 cw(c152.527,99.483) 152.75,99.483 ; U2.11@152.528,99.71 ccw(c152.528,100.333) U2.11@152.968,99.893 ; U2.11@152.528,100.005 cw(c152.528,99.783) 152.75,99.783 ; U2.11@152.625,99.1 ccw(c152.518,99.266) 152.709,99.318 ; U2.11@152.75,98.1 152.75,99.675 ; U2.11@152.75,99.013 cw(c153.731,99.013) U2.11@153.037,99.706 ; v1@152.779,95.771 ccw(c152.186,96.364) U2.11@153.025,96.364 ; v1(152.85,95.7) 153.025,95.875 U2.11@153.025,98.1 ; U2.11@152.925,98.1 cw(c152.684,97.859) 153.025,97.859 ; U2.11@153.034,99.706 ccw(c152.911,99.514) 152.75,99.675 ; U2.11@153.036,100.305 153.036,99.961 152.75,99.675 ; D3.1@157.95,108.6 v1(160.5,108.6) ; D3.1@158.625,107.95 D3.1@158.675,108
  Top Layer w0.4: R51.1@125.8,112.2 127.1,112.2 ; R51.1@126.212,111.848 cw(c127.063,110.997) 127.063,112.2 ; R51.1@126.212,112.484 ccw(c126.898,113.17) 126.898,112.2 ; R17.1@126.525,96.4 127.325,97.2 ; R17.1@126.619,96.884 ccw(c126.619,97.826) 127.285,97.16 ; R17.1@127.067,96.478 cw(c127.959,96.566) 127.325,97.2 ; 127.14,112.16 ccw(c127.806,112.826) R52.1@127.806,111.884 ; R52.1@127.358,111.478 ccw(c126.466,111.566) 127.1,112.2 ; 127.362,97.2 cw(c127.362,95.997) R18.1@128.213,96.848 ; 127.527,97.2 ccw(c127.527,98.17) R18.1@128.213,97.484 ; R52.1@128.312,111.048 cw(c129.163,110.197) 129.163,111.4 ; R52.1@128.312,111.684 ccw(c128.998,112.37) 128.998,111.4 ; R18.1@129.037,96.916 cw(c129.723,96.23) 129.723,97.2 ; R18.1@129.037,97.552 ccw(c129.888,98.403) 129.888,97.2 ; 129.315,111.36 ccw(c129.981,112.026) R25.1@129.981,111.084 ; R25.1@129.533,110.678 ccw(c128.641,110.766) 129.275,111.4 ; R25.1@129.851,110.248 cw(c128.525,108.922) 130.4,108.922 ; 130.04,97.24 cw(c130.706,96.574) R31.1@130.706,97.516 ; R25.1@130.134,110.53 cw(c129.491,109.887) R25.1@130.4,109.887 ; R31.1@130.258,97.922 cw(c129.366,97.834) 130,97.2 ; R31.1@130.8,98 130,97.2 ; v1@130.887,105.488 130.4,105.975 130.4,110.275 R25.1@130.075,110.6 129.275,111.4 ; v1(134.8,123.75) 136.175,123.75 R48.1@136.225,123.7 136.225,122.85 R49.1@137.375,121.7 ; v1@134.825,123.793 ccw(c134.974,124.051) 135.051,123.764 ; v1@135,123.75 ccw(c135,124.961) R48.1@135.857,124.105 ; 135.177,123.75 cw(c135.177,122.789) R48.1@135.857,123.468 ; R48.1@135.927,123.652 ccw(c136.87,123.547) R48.1@136.199,122.876 ; R48.1@136.325,123.608 ccw(c137.928,123.428) 136.787,122.288 ; 136.494,122.581 ccw(c137.325,123.411) R49.1@137.325,122.237 ; 136.583,122.492 cw(c135.877,121.787) R49.1@136.875,121.787 ; R48.1@136.722,123.563 ccw(c138.985,123.31) R49.1@137.375,121.7 ; R49.1@137.475,121.613 ccw(c138.956,121.613) 137.909,120.566 ; R49.1@137.875,121.613 ccw(c140.322,121.613) 138.592,119.883 ; R32.1@138.116,86.212 ccw(c137.43,86.898) 138.4,86.898 ; 138.4,87.063 ccw(c139.603,87.063) R32.1@138.752,86.212 ; R32.1@138.415,85.698 ccw(c139.149,85.578) R32.1@138.623,85.052 ; 138.465,87.24 ccw(c137.799,87.906) R33.1@138.741,87.906 ; R32.1@138.81,85.633 ccw(c140.098,85.423) v1(139.175,84.5) 138.4,85.275 R32.1@138.4,85.8 138.4,87.175 ; R33.1@138.941,88.412 ccw(c138.255,89.098) 139.225,89.098 ; R33.1@139.158,87.457 ccw(c139.087,86.488) 138.4,87.175 ; 139.225,89.263 ccw(c140.428,89.263) R33.1@139.577,88.412 ; 139.265,89.44 ccw(c138.599,90.106) R34.1@139.541,90.106 ; R34.1@139.947,89.658 ccw(c139.859,88.766) 139.225,89.4 ; R34.1@140.025,90.2 139.225,89.4 ; R50.1@141.157,119.182 ccw(c140.389,118.414) 140.389,119.5 ccw(c140.389,120.586) R50.1@141.157,119.818 ; R50.1@141.475,119.5 138.975,119.5 137.375,121.1 R49.1@137.375,121.7 ; v1(150.05,126.2) 151.3,126.2 R44.1@152.7,124.8 152.7,123.675 R45.1@151.725,122.7 150.75,121.725 ; R47.1@150.574,120.909 ccw(c150.149,121.334) R47.1@150.75,121.334 ; R47.1@150.75,120.6 150.75,121.725 ; 150.832,121.807 cw(c151.683,120.956) R45.1@151.683,122.159 ; 150.949,121.924 ccw(c150.263,122.609) R45.1@151.233,122.609 ; R47.1@151.149,120.96 cw(c151.682,121.725) 150.75,121.725 ; 151.747,125.753 ccw(c152.742,126.748) R44.1@152.742,125.341 ; R45.1@151.767,123.241 ccw(c151.767,124.444) 152.618,123.593 ; 152.068,125.432 cw(c151.527,124.891) R44.1@152.292,124.891 ; R45.1@152.217,122.791 cw(c153.187,122.791) 152.501,123.476 ; R44.1@152.374,124.36 cw(c151.815,123.674) 152.7,123.674 ; R37.1@152.475,90.6 153.25,89.825 ; R37.1@152.565,90.06 cw(c152.668,89.243) 153.25,89.825 ; 152.7,123.725 cw(c153.642,123.725) R44.1@152.976,124.391 ; R36.1@152.898,88.912 ccw(c152.047,89.763) 153.25,89.763 ; R37.1@152.959,90.506 ccw(c153.901,90.506) 153.235,89.84 ; 153.25,89.598 ccw(c154.22,89.598) R36.1@153.534,88.912 ; R36.1@153.34,87.96 cw(c153.443,87.143) 154.025,87.725 ; R35.1@153.673,86.812 ccw(c152.822,87.663) 154.025,87.663 ; R36.1@153.734,88.406 ccw(c154.676,88.406) 154.01,87.74 ; R35.1@154.025,86.4 154.025,87.725 ; 154.025,87.498 ccw(c154.995,87.498) R35.1@154.309,86.812 ; D2.1@155.025,114.8 v1(156.475,114.8) ; D2.1@156.043,114.492 cw(c156.475,114.343) v1(156.475,114.8) ; D2.1@156.043,115.108 ccw(c156.475,115.257) v1(156.475,114.8) ; R43.1@159.75,112.5 161.125,112.5 ; R43.1@160.162,112.216 cw(c160.848,111.53) 160.848,112.5 ; R43.1@160.162,112.852 ccw(c161.013,113.703) 161.013,112.5 ; R40.1@160.925,99.9 161.725,99.9 R39.1@162.925,98.7 ; R40.1@160.986,100.199 cw(c161.051,99.302) R40.1@161.687,99.938 ; R40.1@161.015,99.8 cw(c161.134,98.147) 162.306,99.319 ; R40.1@161.044,99.401 cw(c161.217,96.992) R39.1@162.925,98.7 ; 161.165,112.54 cw(c161.831,111.874) R42.1@161.831,112.816 ; R42.1@161.383,113.222 cw(c160.491,113.134) 161.125,112.5 ; R42.1@162.019,113.784 ccw(c162.019,114.726) 162.685,114.06 ; 162.044,99.581 cw(c161.214,98.75) R39.1@162.388,98.75 ; 162.133,99.492 ccw(c162.838,100.198) R39.1@162.838,99.2 ; R39.1@162.404,98.634 ccw(c161.354,98.352) 161.898,99.293 ccw(c162.441,100.234) R39.1@162.722,99.185 ; R42.1@162.467,113.378 cw(c163.359,113.466) 162.725,114.1 ; 162.862,114.1 cw(c162.862,112.897) R41.1@163.713,113.748 ; R39.1@162.925,98.7 ccw(c164.433,100.208) R38.1@164.726,98.096 ; R39.1@163.012,98.2 cw(c163.012,97.202) 163.717,97.908 ; 163.027,114.1 ccw(c163.027,115.07) R41.1@163.713,114.384 ; R39.1@163.462,98.65 ccw(c164.636,98.65) 163.806,97.819 ; 163.493,98.132 ccw(c164.572,99.21) R38.1@164.782,97.7 ; R41.1@163.901,114.452 ccw(c163.541,114.813) 164.05,114.813 ; 164.05,115.629 ccw(c165.713,115.629) R41.1@164.537,114.452 ; v1(164.05,116.3) 164.05,114.175 R41.1@164.125,114.1 162.725,114.1 R42.1@161.925,113.3 161.125,112.5 ; R38.1@164.062,97.563 ccw(c164.71,98.212) R38.1@164.837,97.303 ; R38.1@164.973,97.599 ccw(c165.134,98.296) R38.1@165.64,97.79 ; R38.1@165.063,97.988 ccw(c165.326,99.124) v1(166.15,98.3) 165.45,97.6 R38.1@164.875,97.6 164.025,97.6 R39.1@162.925,98.7 ; 127.1,112.2 R52.1@127.9,111.4 129.275,111.4 ; 127.325,97.2 R18.1@128.625,97.2 130,97.2 ; 138.4,87.175 R33.1@139.225,88 139.225,89.4 ; 153.25,89.825 R36.1@153.25,88.5 154.025,87.725
  Bottom Layer w0.3: D1.1@135.287,99.601 cw(c134.945,98.9) v1(135.725,98.9) ; D1.1@135.725,100.5 v1(135.725,98.9) ; D1.1@136.163,99.601 ccw(c136.505,98.9) v1(135.725,98.9) ; C2.2@140.094,102.302 v1@141.623,102.302 ; R11.1@140.813,93.613 cw(c140.24,93.04) v1@141.05,93.04 ; v1@140.963,93.05 ccw(c140.723,93.189) 140.991,93.26 ; C2.2@140.992,101.924 cw(c141.623,101.587) v1@141.623,102.302 ; C2.2@140.992,102.68 ccw(c141.623,103.017) v1@141.623,102.302 ; v1(141.05,93) R11.1@141.05,93.9 ; v1@141.05,93.161 cw(c141.689,93.161) R11.1@141.237,93.613 ; 141.098,93.341 ccw(c141.469,93.242) v1@141.137,93.05 ; v1(141.625,102.3) v1@141.623,102.302 ; GND.1@145.153,102.953 cw(c144.555,102.355) 145.4,102.355 cw(c146.245,102.355) GND.1@145.647,102.953 ; v1@145.313,102.35 ccw(c145.062,102.495) 145.342,102.57 ; v1(145.4,102.3) GND.1@145.4,103.7 ; 145.458,102.57 ccw(c145.738,102.495) v1@145.487,102.35 ; P1.1@149.85,94.3 P1.1@149.85,94.425 ; C7.2@150.988,97.288 cw(c150.476,96.776) 151.2,96.776 cw(c151.924,96.776) C7.2@151.412,97.288 ; v1(151.2,96.4) C7.2@151.2,97.55 ; C11.2@156.85,98.8 cw(c156.85,97.955) v1@157.447,98.553 ; C11.2@156.85,99.15 v1(157.5,98.5) ; C11.2@157.15,99.1 ccw(c157.754,99.1) v1@157.327,98.673 ; C11.2@157.248,98.81 ccw(c157.644,99.039) v1@157.526,98.597 ; C11.2@157.26,98.661 cw(c157.107,98.395) v1@157.403,98.474 ; v1(160.5,108.6) 161.95,108.6 Q1.2@163.05,109.7 ; 162.495,109.145 ccw(c161.94,109.7) Q1.2@162.725,109.7 ; 162.556,109.206 cw(c163.025,108.736) Q1.2@163.025,109.4
  Bottom Layer w0.4: v1(134.8,123.75) C13.2@135.75,122.8 ; 135.281,123.269 cw(c134.811,122.8) C13.2@135.475,122.8 ; C13.2@135.341,123.209 ccw(c135.725,123.593) C13.2@135.725,123.05 ; U4.2@140.2,123.7 144.5,123.7 ; 145.388,124.588 ccw(c144.876,125.1) C3.2@145.6,125.1 ; 145.438,123.012 cw(c144.926,122.5) C14.2@145.65,122.5 ; C3.2@145.509,124.709 cw(c145.85,124.367) C3.2@145.85,124.85 ; C14.2@145.559,122.891 ccw(c145.9,123.233) C14.2@145.9,122.75 ; C3.2@145.723,125.277 ccw(c145.296,125.704) 145.9,125.704 ccw(c146.504,125.704) C3.2@146.077,125.277 ; v1(145.9,126) C3.2@145.9,125.1 144.5,123.7 ; C14.2@145.95,122.5 144.75,123.7 144.5,123.7 ; 159.975,104.715 cw(c161.035,104.715) v1@160.285,105.465 ; 159.975,105.111 cw(c160.32,105.111) v1@160.259,105.451 ; v1(160.25,105.5) 159.975,105.225 159.975,104.485 161.069,103.391 Q6.2@161.152,103.391
  Bottom Layer w0.6: D4.4@130.225,107.45 132.225,107.45 R30.1@132.875,108.1 ; D4.4@130.7,107.84 ccw(c131.397,109.047) 131.758,107.7 ; D4.4@130.793,107.132 cw(c131.561,106.364) 131.561,107.45 cw(c131.561,108.536) D4.4@130.793,107.768 ; D4.4@130.823,107.45 ccw(c130.823,110.052) R30.1@132.663,108.212 ; D4.4@130.865,107.225 cw(c131.539,106.836) 131.338,107.588 ; v1(130.9,105.5) v1(131.3,105.1) ; 131.994,92.86 cw(c131.994,90.842) U1.9@133.478,92.209 ; 132.271,107.45 ccw(c132.271,108.604) R30.1@133.087,107.788 ; R30.1@132.434,107.659 ccw(c131.986,108.106) R30.1@132.619,108.106 ; U1.9@132.757,92.86 ccw(c132.757,93.593) U1.9@133.275,93.075 ; U1.9@133.037,91.803 ccw(c130.625,89.581) U1.6@130.625,92.86 132.99,92.86 v1(133.24,93.11) ; U1.9@133.205,93.075 ccw(c133.723,93.593) U1.9@133.723,92.86 ; U1.9@133.772,92.209 cw(c135.256,90.842) 135.256,92.86 ; U1.9@133.772,94.781 ccw(c135.256,96.148) 135.256,94.13 ; U1.9@133.828,93.754 cw(c134.26,93.694) U1.9@134.26,94.13 ; U1.9@133.842,93.783 cw(c134.68,92.945) U1.9@134.68,94.13 ; U1.9@134.213,91.803 cw(c136.625,89.581) U1.3@136.625,92.86 133.49,92.86 v1(133.24,93.11) ; U1.9@134.213,95.187 ccw(c136.625,97.409) U1.2@136.625,94.13 U1.9@134.26,94.13 ; v1(133.24,93.11) U1.9@133.625,93.495 v1(133.878,93.748) U1.9@134.26,94.13
  Bottom Layer w1: D4.4@130.225,107.45 130.225,106.175 v1(130.9,105.5)
  other v1: 143.45,83.6 148.65,83.8 154.9,85.4 134,87.1 129.875,89.8 161.075,90.2 142.575,93.2 144.65,93.6 164.3,94.3 124.425,98.4 143.1,100 148.3,101.8 149.65,103.1 123.75,107.2 167,107.7 134.475,112.5 129.675,120.1 159.25,121.9 140.725,126.4 149.025,126.6
GREEN: D5.5 D6.5 D7.5 D8.5 D9.5 D10.5 D11.5 D12.5 Q4.3 | length 127.9
  Top Layer w0.4: D7.5@142.81,87.325 v1@145,87.325 ; D7.5@143.707,87.078 cw(c144.305,86.48) 144.305,87.325 cw(c144.305,88.17) D7.5@143.707,87.572
  Top Layer w0.5: v1@145,87.325 v1(145.025,87.3)
  Top Layer w0.6: D5.5@127.023,107.039 cw(c126.596,106.612) 127.2,106.612 cw(c127.804,106.612) D5.5@127.377,107.039 ; v1(127.2,106) D5.5@127.2,107.865 ; v1(129,95.9) D6.5@130.108,94.792 ; 129.767,95.133 cw(c129.308,94.674) D6.5@129.957,94.674 ; 129.813,95.087 ccw(c130.207,95.481) D6.5@130.207,94.924 ; v1@132.888,118.388 134.339,119.839 D12.5@134.339,119.889 ; 133.417,118.917 ccw(c132.905,119.429) D12.5@133.629,119.429 ; v1@146.275,123.475 v1(146.25,123.5) D11.5@147.94,123.5 ; 146.651,123.5 cw(c146.651,122.811) D11.5@147.139,123.298 ; D8.5@156.461,90.617 157.625,91.781 v1(157.625,91.8) ; D8.5@156.921,91.327 ccw(c156.921,91.93) 157.347,91.503 ccw(c157.774,91.077) D8.5@157.171,91.077 ; D10.5@160.114,116.361 D10.5@160.114,116.386 ; D10.5@160.464,116.261 v1@161.4,115.325 ; D10.5@160.574,115.676 cw(c160.574,114.53) v1@161.385,115.34 ; D9.5@163.323,103.561 ccw(c162.896,103.988) 163.5,103.988 ccw(c164.104,103.988) D9.5@163.677,103.561 ; v1(163.45,104.4) 163.5,104.35 D9.5@163.5,102.735
  Mid-Layer 2 w0.6: 127.2,97.675 v1@128.987,95.887 ; 127.2,97.681 v1(127.2,106) 127.2,112.7 138,123.5 v1(146.25,123.5) 153.225,123.5 161.4,115.325 v1(161.4,115.275) 163.45,113.225 v1(163.45,104.4) 163.45,97.625 v1(157.625,91.8) 153.125,87.3 v1(145.025,87.3)
  Bottom Layer w0.5: v1(161.4,115.275) 161.4,118.25 Q4.3@161.85,118.7 ; 161.4,117.191 cw(c163.334,117.191) Q4.3@161.966,118.559 ; Q4.3@161.4,118.398 cw(c162.127,118.398) Q4.3@161.613,118.912
  other v1: 132.875,118.4
INPUT: Q1.3 R1.1 U2.6 | length 26.8
  Top Layer w0.2: U2.6@154.337,97.593 155,97.593 v1(155,96.5) ; v1@154.894,96.606 ccw(c154.638,96.862) 155,96.862 ccw(c155.362,96.862) v1@155.106,96.606 ; 155,97.201 cw(c155.502,97.201) U2.6@155.147,97.556
  Mid-Layer 2 w0.2: v1@154.894,96.606 ccw(c154.638,96.862) 155,96.862 ccw(c155.362,96.862) v1@155.106,96.606 ; v1(155,96.5) 155,98.25 159.5,102.75 v1(159.5,109.5) ; v1@159.394,109.394 cw(c159.138,109.138) 159.5,109.138 cw(c159.862,109.138) v1@159.606,109.394
  Bottom Layer w0.2: R1.1@158.303,109.116 cw(c158.84,108.932) 158.84,109.5 ; R1.1@158.35,109.05 158.8,109.5 v1@159.4,109.5 ; R1.1@158.492,109.051 cw(c159.12,108.836) 159.12,109.5 ; R1.1@158.681,108.986 cw(c159.4,108.74) v1@159.4,109.5 ; 159.083,109.415 cw(c159.2,108.98) v1@159.425,109.37 ; 159.204,109.447 ccw(c159.133,109.712) v1@159.37,109.575 ; v1@159.394,109.394 ccw(c159.138,109.138) 159.138,109.5 ccw(c159.138,109.862) v1@159.394,109.606 ; v1@159.5,109.6 v1@159.4,109.5
  Bottom Layer w0.254: v1@159.5,109.6 Q1.3@160.55,110.65 ; v1@159.623,109.5 cw(c160.161,109.5) 159.781,109.881 ; 159.956,110.056 ccw(c159.362,110.65) Q1.3@160.202,110.65 ; 160.016,110.116 cw(c160.525,109.608) Q1.3@160.525,110.327
LED_B: R21.2 R22.2 U2.4 | length 27.9
  Top Layer w0.2: v1(148.65,98) 150.16,98 150.253,98.093 U2.4@151.038,98.093 ; v1@148.756,97.894 cw(c149.012,97.638) 149.012,98 cw(c149.012,98.362) v1@148.756,98.106
  Bottom Layer w0.2: R21.2@137.553,86.347 ccw(c136.955,86.945) 137.8,86.945 ccw(c138.645,86.945) R21.2@138.047,86.347 ; R22.2@137.578,87.753 cw(c137.04,87.215) 137.8,87.215 ; R22.2@137.578,88.247 ccw(c136.98,88.845) 137.825,88.845 ccw(c138.67,88.845) R22.2@138.072,88.247 ; R21.2@137.8,86.1 137.8,87.975 R22.2@137.825,88 137.825,89.525 140.3,92 146.925,92 148.675,93.75 148.675,98 v1(148.65,98) ; 137.8,87.095 cw(c138.73,87.095) R22.2@138.072,87.753 ; v1@148.544,97.894 cw(c148.228,97.578) 148.675,97.578 ; 148.675,97.698 cw(c148.952,97.698) v1@148.756,97.894
LED_G: R19.2 R20.2 U2.1 | length 31
  Top Layer w0.2: U2.1@150.863,99.618 151,99.756 151,102.9 150.3,103.6 150.3,108.125 154.975,112.8 156.475,112.8 157.125,113.45 157.125,116.675 v1(156.425,117.375) ; 151,99.836 ccw(c151.255,99.836) U2.1@151.075,99.656 ; v1@156.425,117.225 cw(c156.425,116.863) 156.681,117.119 cw(c156.937,117.375) v1@156.575,117.375
  Bottom Layer w0.2: R19.2@155.553,118.247 ccw(c154.955,118.845) 155.8,118.845 ccw(c156.645,118.845) R19.2@156.047,118.247 ; R20.2@155.553,119.453 cw(c154.955,118.855) 155.8,118.855 cw(c156.645,118.855) R20.2@156.047,119.453 ; R20.2@155.8,119.7 R19.2@155.8,118 v1(156.425,117.375) cw(c156.974,117.924) R19.2@156.199,117.976 ; R19.2@155.85,117.65 cw(c155.85,116.926) v1@156.362,117.438 ; R19.2@156.075,117.604 cw(c155.854,117.222) v1@156.28,117.336 ; 156.171,117.548 ccw(c156.313,117.794) v1@156.386,117.52 ; v1@156.275,117.375 ccw(c155.913,117.375) 156.169,117.631 ccw(c156.425,117.887) v1@156.425,117.525 ; v1@156.28,117.414 ccw(c155.93,117.508) 156.244,117.689 ccw(c156.558,117.87) v1@156.464,117.52
LED_R: R4.2 R6.2 U2.9 | length 34.9
  Top Layer w0.2: U2.9@154.337,99.118 155.968,99.118 156.25,99.4 v1(156.25,101.45) ; v1@156.144,101.344 cw(c155.888,101.088) 156.25,101.088 cw(c156.612,101.088) v1@156.356,101.344
  Bottom Layer w0.254: R4.2@146.097,86.328 ccw(c145.545,86.88) 146.325,86.88 ccw(c147.105,86.88) R4.2@146.553,86.328 ; R6.2@146.097,87.772 cw(c145.545,87.22) 146.325,87.22 cw(c147.105,87.22) R6.2@146.553,87.772 ; R6.2@146.325,88 R4.2@146.325,86.1 147.325,85.1 150.251,85.1 150.7,85.549 150.7,88.175 155,92.475 155,95.225 154.15,96.075 154.15,99.9 155.7,101.45 v1(156.25,101.45) ; R4.2@146.375,85.777 cw(c146.375,85.118) 146.841,85.584 ; R4.2@146.698,86.1 ccw(c147.598,86.1) 146.962,85.463 ; v1@156.163,101.363 ccw(c155.953,101.153) 155.953,101.45 ccw(c155.953,101.747) v1@156.163,101.537
LEDCTL: LED_CTL.1 U2.5 | length 25.6
  Top Layer w0.254: 143.247,101.947 ccw(c142.995,102.2) v1@143.352,102.2 ; 143.308,102.008 cw(c143.475,101.84) v1@143.475,102.077 ; v1@143.45,102.275 143.45,102.15 141.65,100.35 141.65,95.025 143.775,92.9 146.775,92.9 150.5,96.625 150.5,97.593 U2.5@151.038,97.593 ; U2.5@150.422,97.576 cw(c150.233,97.387) 150.5,97.387
  Bottom Layer w0.254: LED_CTL.1@143.165,102.933 cw(c142.452,102.199) v1(143.475,102.2) ; v1@143.368,102.261 ccw(c143.112,102.409) 143.398,102.486 ; v1@143.388,102.287 ccw(c143.178,102.497) 143.475,102.497 ccw(c143.772,102.497) v1@143.562,102.287 ; 143.398,102.487 ccw(c143.686,102.565) v1@143.536,102.307 ; v1(143.475,102.2) LED_CTL.1@143.475,103.6 ; v1@143.475,102.42 cw(c144.205,102.42) LED_CTL.1@143.689,102.936 ; 143.532,102.634 ccw(c144.007,102.507) v1@143.582,102.261
NetC1_1: C1.1 U1.1 | length 3.9
  Bottom Layer w0.6: C1.1@134.475,97.5 136,97.5 136.625,96.875 U1.1@136.625,95.4
NetC1_2: C1.2 D1.2 L1.1 U1.8 | length 23.3
  Top Layer w0.6: L1.1@133.133,101.357 ccw(c132.357,102.3) v2@133.578,102.3 ; L1.1@133.578,100.067 v2@133.578,102.3 ; L1.1@134.022,101.357 cw(c134.798,102.3) v2@133.578,102.3
  Bottom Layer w0.6: U1.8@130.625,95.4 130.625,96.7 131.5,97.575 131.5,100.225 D1.2@131.225,100.5 131.275,100.5 133.075,102.3 v2(133.6,102.3) ; D1.2@130.624,99.899 cw(c128.509,97.784) 131.5,97.784 ; D1.2@131.048,100.323 cw(c129.958,99.233) 131.5,99.233 ; D1.2@131.225,101.35 ccw(c131.225,103.523) 132.761,101.986 ; 131.5,97.5 C1.2@132.825,97.5 ; 131.5,99.112 cw(c132.613,99.112) D1.2@131.826,99.899 ; D1.2@132.075,100.5 cw(c134.006,100.5) 132.641,101.866 ; 132.533,101.758 cw(c133.6,100.691) v2@133.6,102.2
NetC3_1: C3.1 U4.4 | length 4.7
  Bottom Layer w0.4: U4.4@142.35,124.65 143.8,124.65 C3.1@144.25,125.1 ; U4.4@142.51,124.65 ccw(c142.51,126.79) C3.1@144.023,125.277 ; 143.476,124.65 ccw(c143.476,125.824) C3.1@144.306,124.994
NetC5_1: C5.1 R27.1 R.1 | length 10.8
  Bottom Layer w0.3: R.1@145.153,107.647 ccw(c144.555,108.245) 145.4,108.245 ccw(c146.245,108.245) R.1@145.647,107.647 ; R.1@145.4,106.9 145.4,108.3 145.7,108.6 146.525,108.6 R27.1@147.625,109.7 C5.1@149.45,109.7 ; 147.028,109.103 ccw(c146.43,109.7) R27.1@147.275,109.7 ; 147.148,109.223 cw(c147.575,108.796) R27.1@147.575,109.4 ; R27.1@147.887,109.488 cw(c148.399,108.976) 148.399,109.7 cw(c148.399,110.424) R27.1@147.887,109.912 ; C5.1@149.188,109.488 ccw(c148.676,108.976) 148.676,109.7 ccw(c148.676,110.424) C5.1@149.188,109.912
NetC5_2: C5.2 R10.1 | length 8.7
  Bottom Layer w0.3: R10.1@151.075,114.6 151.375,114.3 151.9,114.3 ; C5.2@151.1,109.7 151.15,109.7 152.475,111.025 152.475,113.725 151.9,114.3 ; R10.1@151.125,114.6 ccw(c151.512,114.7) R10.1@151.512,114.3 ; C5.2@151.15,110 ccw(c151.15,110.724) 151.662,110.212 ccw(c152.174,109.7) C5.2@151.45,109.7 ; R10.1@151.415,114.675 ccw(c151.9,114.8) 151.9,114.3